# Altium PCB PetTrackerPCB.PcbDoc (part 1 of 2)
Units mm, origin at the board's own origin, x right, y up, seen from the top; angles counter-clockwise.
Board outline 116.71 x 58.42 mm, 4 copper layers (Top Layer, GND Plane, PWR Plane, Bottom Layer), stack 0.868 mm thick; 35 components, 37 nets, 209 pads, 70 vias.
Unrouted connection lines stored in the file: 47.
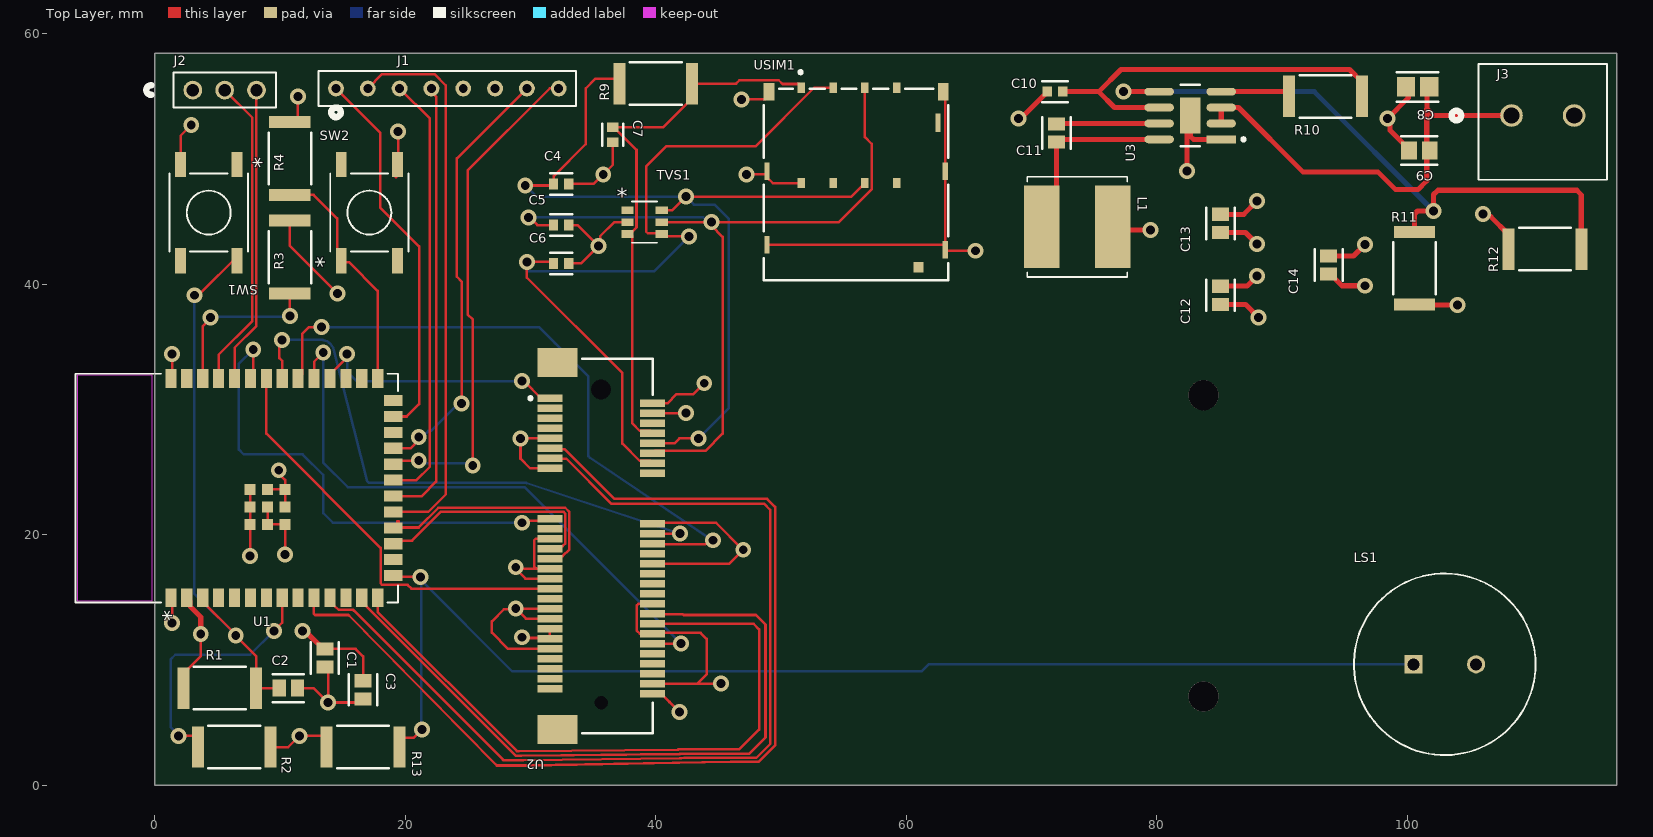
[diagram p0: Top Layer view]
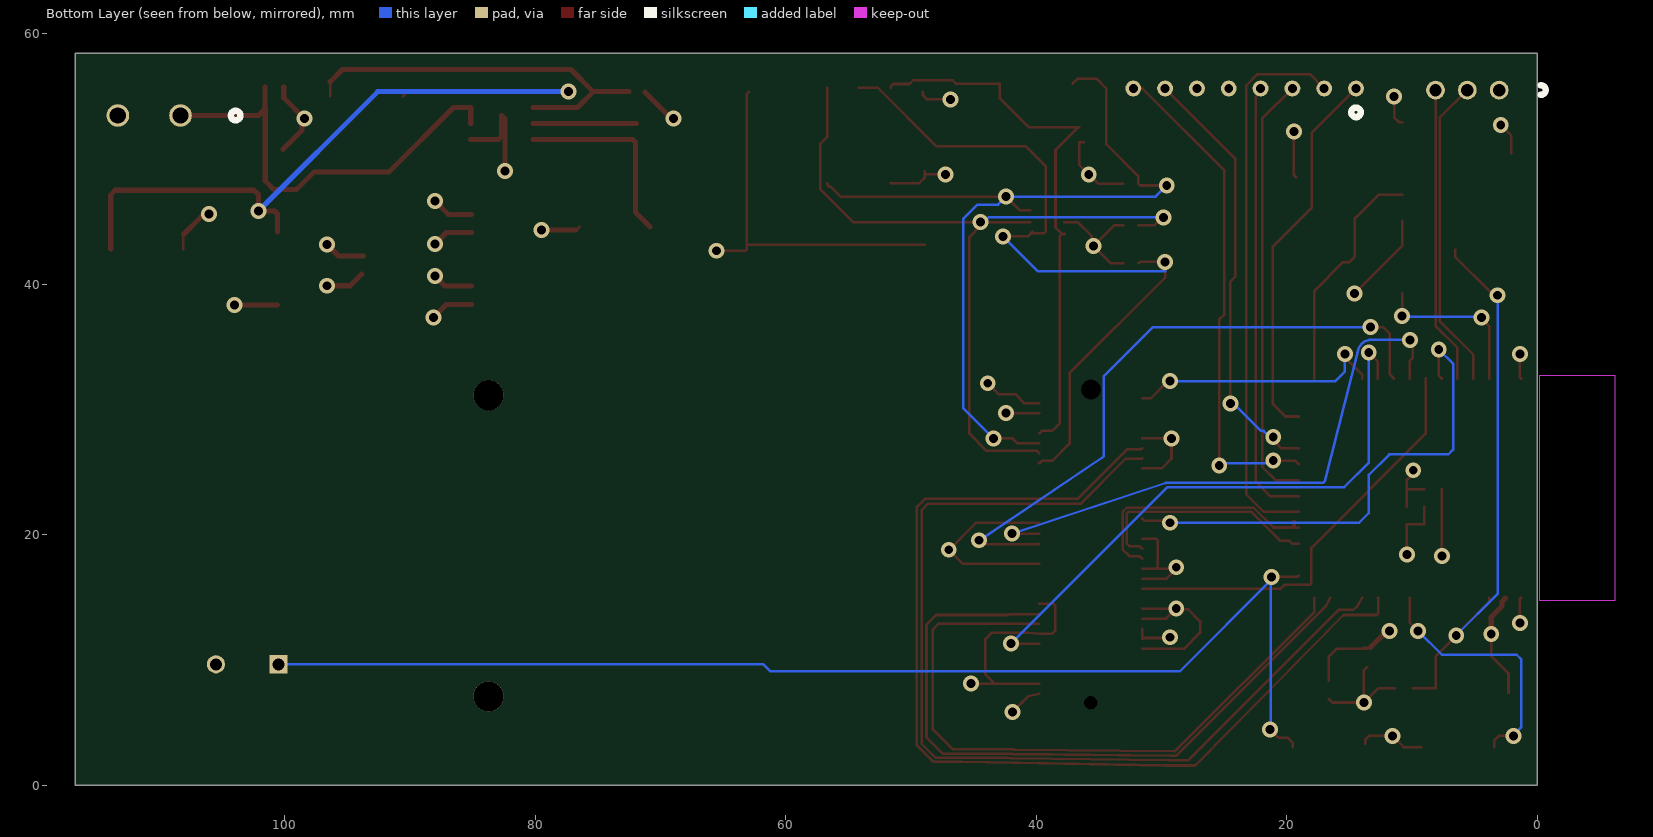
[diagram p1: Bottom Layer view, seen from below]
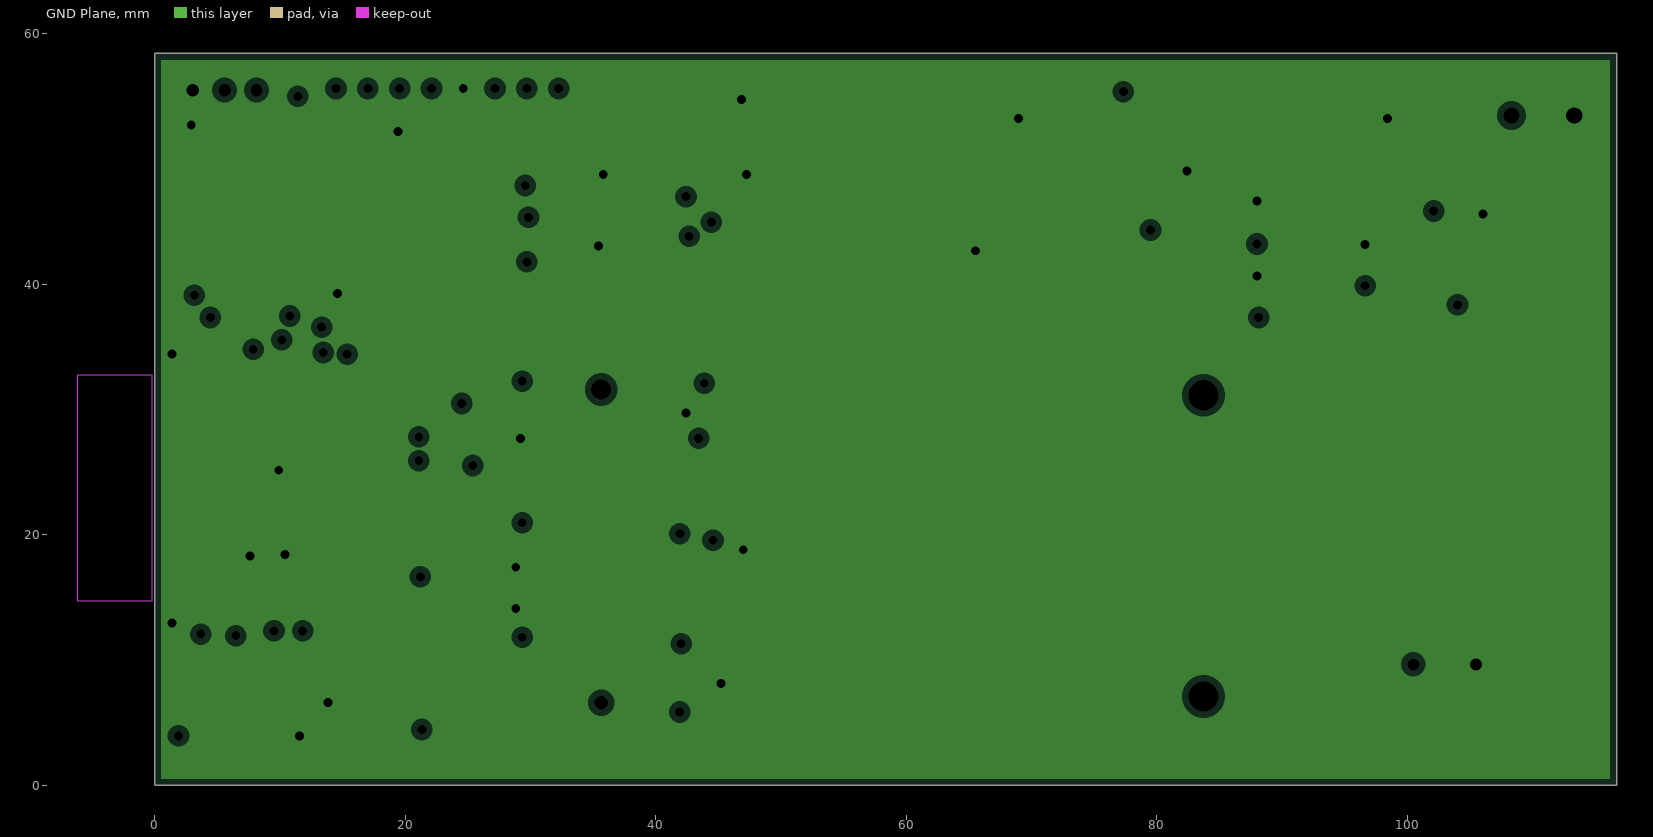
[diagram p2: GND Plane, clearances drawn from the general rule]
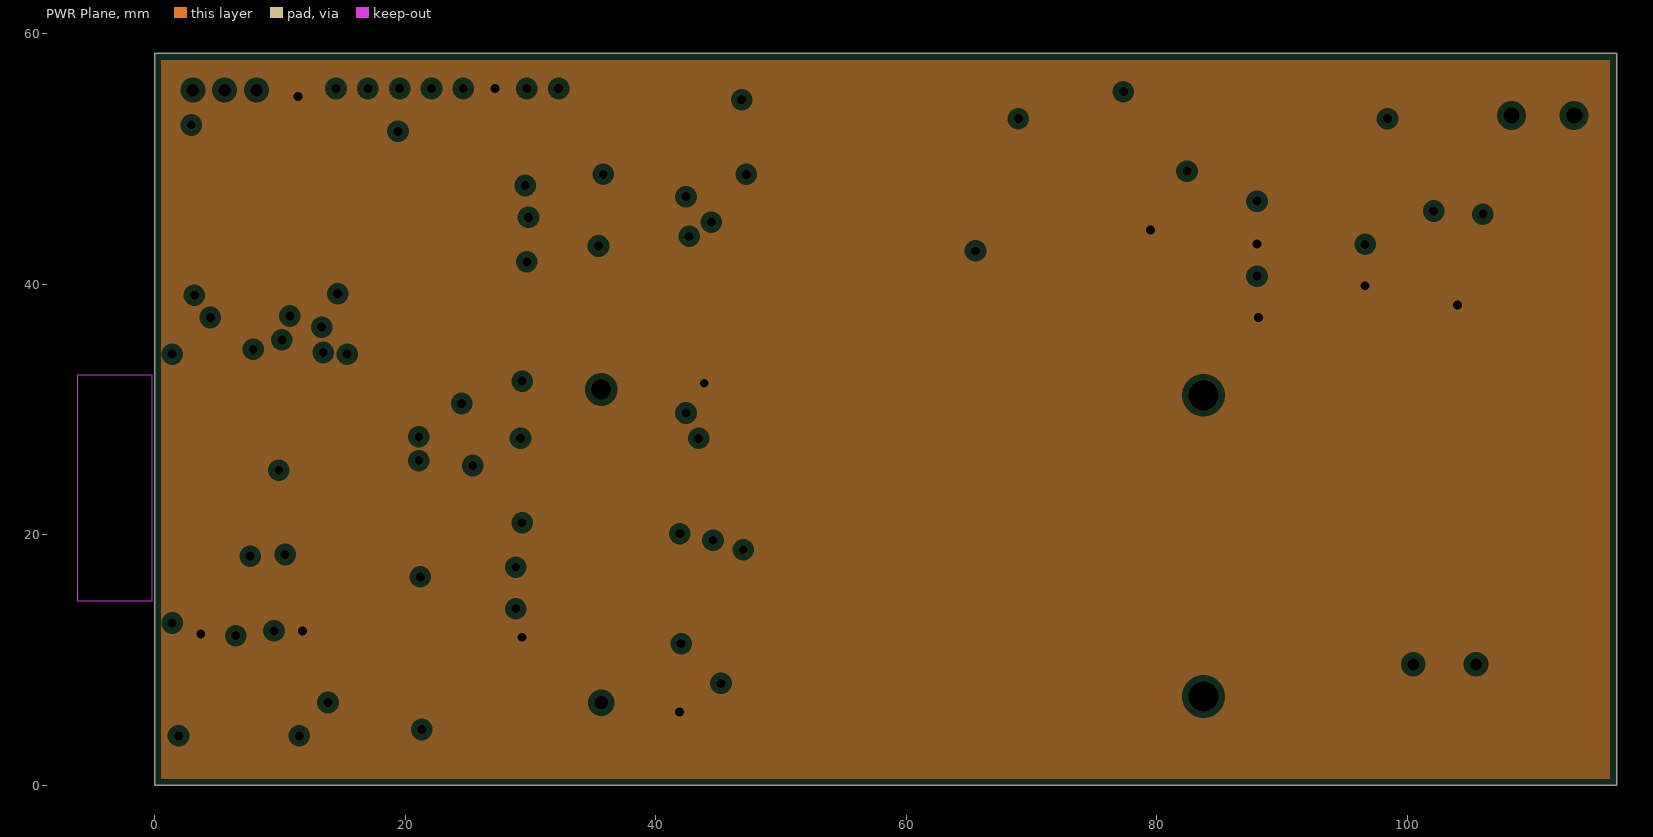
[diagram p3: PWR Plane, clearances drawn from the general rule]
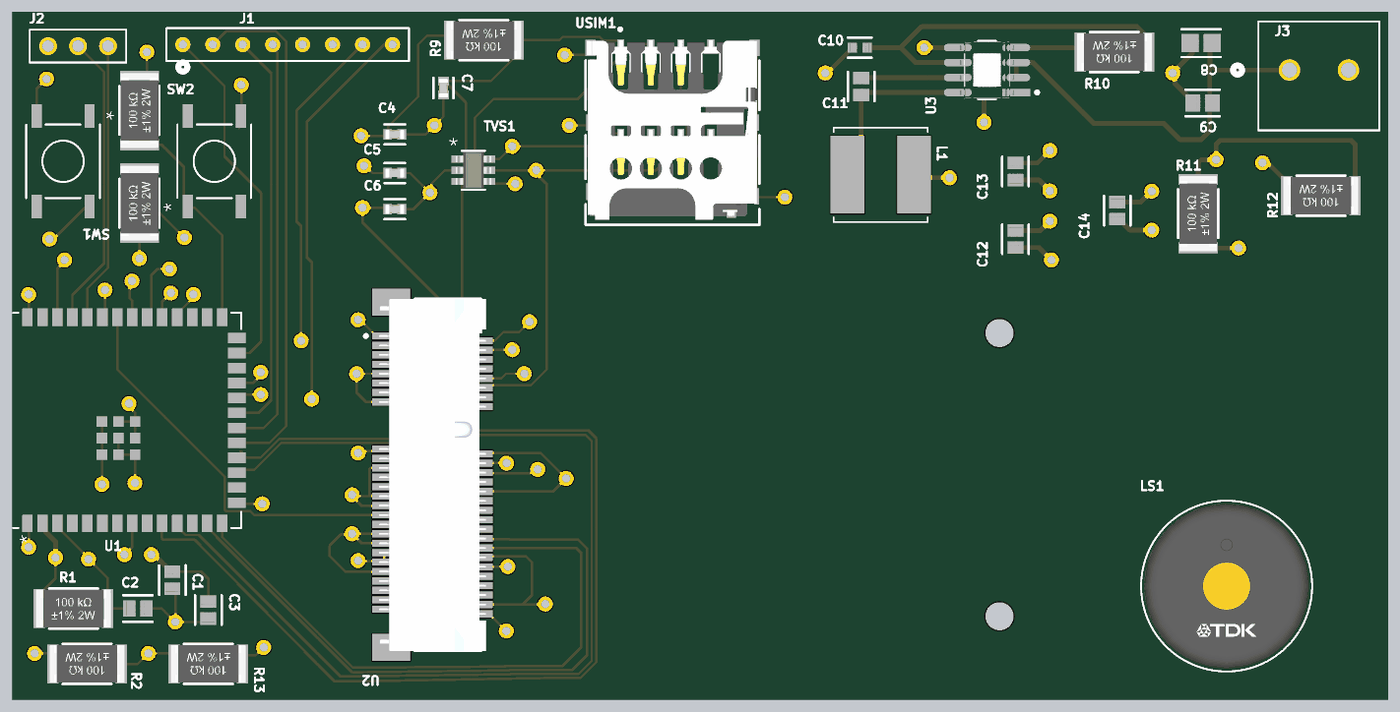
[diagram p4: 3D render of the assembled board from above, using the file's embedded part models]

## Layer stack, top to bottom
Top Solder: solder mask 0.0102, Solder Resist, Dk 3.5
Top Layer: signal copper 0.0356
Dielectric 4: core 0.1016, Core-009, Dk 4.5
Dielectric 2: core 0.1016, Core-009, Dk 4.5
GND Plane: plane copper 0.035, net GND
Dielectric 1: dielectric 0.32, FR-4, Dk 4.8
PWR Plane: plane copper 0.035, net +3V3
Dielectric 3: core 0.1016, Core-009, Dk 4.5
Dielectric 5: core 0.1016, Core-009, Dk 4.5
Bottom Layer: signal copper 0.0356
Bottom Solder: solder mask 0.0102, Solder Resist, Dk 3.5

## Board outline
0,0 116.713,0 116.713,58.42 0,58.42

## Design rules (kind name [scope] priority, off if disabled: settings)
Clearance [All] p1: gap=0.127 ignorepadtopadclearanceinfootprint=TRUE
Height [All] p1 off: minheight=0 maxheight=25.4 prefheight=12.7
PlaneClearance [All] p1: clearance=0.508
PlaneConnect [All] p1: planeconnectstyle=Relief reliefexpansion=0.508 reliefentries=4 reliefconductorwidth=0.254 reliefairgap=0.254
PolygonConnect [All] p1: connectstyle=Relief reliefconductorwidth=0.254 reliefentries=4 polygonreliefangle="90 Angle" airgapwidth=0.254
RoutingVias [All] p1: holewidth=0.711 width=1.27 viastyle="Through Hole" minholewidth=0.711 minwidth=1.27 maxholewidth=0.711 maxwidth=1.27
SolderMaskExpansion [All] p1: expansion=0.102 istentingtop=FALSE
SupplyNets "Schematic Supply Nets_2" [InNet('GND')] p1: voltage=0.000
SupplyNets "Schematic Supply Nets_1" [InNet('Vin')] p2: voltage=0.000
SupplyNets "Schematic Supply Nets" [InNet('+3V3')] p3: voltage=0.000
Width [All] p1: maxlimit=25.4 minlimit=0.127 preferedwidth=0.203
27 further rules are at their usual default settings.

## Classes and differential pairs
component class PowerSupply: C8 C9 C10 C11 C12 C13 C14 CBOOT CHF CIN Cout CVCC J3 L L1 R10 R11 R12 RFBB RFBT U3
component class EC25: C4 C5 C6 C7 CRF1 CRF2 CRF3 CRF4 R9 RDB1 RDB2 RDB3 RS1 TVS1 "TVS Array" U2 USIM1 "USIM Connector"
component class Dataflow: C1 C2 C3 "Camera Interface" J1 J2 LS1 R1 R2 R3 R4 R13 RDB RPU1 S2 SW1 SW2 U1 "USB Connector"

## Components (designator, comment, footprint, x,y, rotation, side; value= is the part's Value field where it differs from the comment)
C1 "22uF" FP-CL21-IPC_C 13.589,10.16 r270 top
C2 "100nF" FP-CL21-IPC_C 10.668,7.747 r0 top
C3 "100nF" FP-CL21-IPC_C 16.637,7.62 r270 top
C4 "0.1uF" FP-C0603C-CF-MFG 32.447,48.006 r0 top value="0.10 μF"
C5 "0.1uF" FP-C0603C-CF-MFG 32.447,44.72 r0 top value="0.10 μF"
C6 "0.1uF" FP-C0603C-CF-MFG 32.447,41.656 r0 top value="0.10 μF"
C7 "0.1uF" FP-C0603C-CF-MFG 36.576,51.943 r270 top value="0.10 μF"
C8 "10uF" FP-CL21-IPC_A 100.838,55.753 r180 top
C9 "220nF" FP-CL21-IPC_B 100.965,50.673 r180 top
C10 "1uF" FP-CL10-IPC_C 71.882,55.372 r180 top
C11 "100nF" FP-CL21-IPC_C 72.009,52.07 r270 top
C12 "22uF" FP-CL21-IPC_C 85.09,39.116 r90 top
C13 "22uF" FP-CL21-IPC_C 85.09,44.855 r90 top
C14 "22uF" FP-CL21-IPC_C 93.726,41.529 r90 top
J1 "TS-108-T-A" CON8_1X8_TU_HTS_SAI 23.368,55.626 r0 top
J2 "PREC003SAAN-RC" CONN_PREC003SAAN-RC_SUL 3.048,55.499 r0 top
J3 "1935161" CONN_1935161_PXC 108.331,53.467 r0 top value=10uF
L1 "6.8 µH" IND_SRN8040TA-6R8M 73.66,44.577 r0 top
LS1 "PS1440P02BT" FP-PS1440P02BT-MFG 102.997,9.652 r0 top
R1 "10kΩ" FP-CRGP2512-IPC_C 5.207,7.747 r0 top value=10KΩ
R2 "10kΩ" FP-CRGP2512-IPC_C 6.35,3.048 r180 top value=10KΩ
R3 "10kΩ" FP-CRGP2512-IPC_C 10.795,42.164 r90 top value=10KΩ
R4 "10kΩ" FP-CRGP2512-IPC_C 10.795,50.038 r90 top value=10KΩ
R9 "15kΩ" FP-CRGP2512-IPC_C 40.005,56.007 r180 top value=15KΩ
R10 "100kΩ" FP-CRGP2512-IPC_C 93.472,54.991 r180 top value=100KΩ
R11 "100kΩ" FP-CRGP2512-IPC_C 100.584,41.275 r90 top
R12 "3.3kΩ" FP-CRGP2512-IPC_C 110.998,42.799 r180 top value=3.3KΩ
R13 "1kΩ" FP-CRGP2512-IPC_C 16.637,3.048 r180 top value=1KΩ
SW1 "PTS645SL43SMTR92LFS" PTS645SL43SMTR92LFS_CNK 4.318,45.72 r270 top
SW2 "PTS645SL43SMTR92LFS" PTS645SL43SMTR92LFS_CNK 17.145,45.72 r90 top
TVS1 "AQRV05-4HTG" SOT23-6_LTF 39.116,44.958 r0 top
U1 "ESP32-S2-SOLO-N4R2" MOD41_ESP32-S2-SOLO_EXP 6.557,23.722 r90 top
U2 "2041119-1" TECO-2041119-1_3_V 35.651,19.092 r270 top
U3 "LMR33640ADDAR" FP-DDA0008J-IPC_A 82.677,53.467 r180 top
USIM1 "78727-0001" FP-78727-0001-MFG 56.007,46.609 r90 top

## Footprints (in the part's own frame and the unit in brackets; to place one, negate y for a bottom-side part, rotate by r counter-clockwise, add the part's x,y. Pads: shape width x height; smd on the part's side, far side on the other; paste and mask are expansions set on the pad)
CON8_1X8_TU_HTS_SAI [mil]
  round 50 / inner round 60 / far side round 50 hole 28 paste-99999 mask+0: 1(-350,0) 2(-250,0) 3(-150,0) 4(-50,0) 5(50,0) 6(150,0) 7(250,0) 8(350,0)
  silkscreen extent -405,-90 405,55
CONN_1935161_PXC [mil]
  round 71 / inner round 60 / far side round 71 hole 51 paste-99999 mask+0: 1(0,0) 2(196.85,0)
  silkscreen extent -188,-202 300,162
CONN_PREC003SAAN-RC_SUL [mil]
  round 59 / inner round 60 / far side round 59 hole 39 paste-99999 mask+0: 1(0,0) 2(100,0) 3(200,0)
  silkscreen extent -146,-55 261,55
FP-78727-0001-MFG [mm]
  rect 1.4x0.42 smd paste+0 mask+0: 1(-3.465,7.11) 2(2.395,7.11) 5(-3.865,-7.12) 6(2.395,-7.12)
  rect 1.4x0.87 smd paste+0 mask+0: 3(8.745,6.95) 8(8.745,-6.95)
  rect 0.85x0.8 smd paste+0 mask+0: 4(-5.245,-4.98)
  rect 1.5x0.4 smd paste+0 mask+0: 7(6.275,-6.54)
  rect 0.8x0.6 smd paste+0 mask+0: C1(9.075,4.38) C2(9.075,1.84) C3(9.075,-0.7) C4(9.075,-3.24) C5(1.455,4.38) C6(1.455,1.84) C7(1.455,-0.7) C8(1.455,-3.24)
  silkscreen extent -6.28,-7.36 10.44,7.36, body extent -6.38,-7.48 9.57,7.48, height 0.25
FP-C0603C-CF-MFG [mm]
  rect 0.75x0.9 smd paste+0 mask+0: 1(-0.6,0) 2(0.6,0)
  silkscreen extent -0.88,-0.85 0.88,0.85, body extent -1.2,-0.6 1.2,0.6, height 0.25
FP-CL10-IPC_C [mm]
  rect 0.758x0.812 smd paste+0 mask+0: 1(-0.627,0) 2(0.627,0)
  silkscreen extent -1.01,-0.85 1.01,0.85, body extent -1.11,-0.55 1.11,0.55, height 0.25
FP-CL21-IPC_A [mm]
  rect 1.455x1.556 smd paste+0 mask+0: 1(-0.926,0) 2(0.926,0)
  silkscreen extent -1.65,-1.18 1.65,1.18, body extent -2.15,-1.28 2.15,1.28, height 0.25
FP-CL21-IPC_B [mm]
  rect 1.255x1.456 smd paste+0 mask+0: 1(-0.826,0) 2(0.826,0)
  silkscreen extent -1.45,-1.13 1.45,1.13, body extent -1.7,-0.98 1.7,0.98, height 0.25
FP-CL21-IPC_C [mm]
  rect 1.055x1.356 smd paste+0 mask+0: 1(-0.726,0) 2(0.726,0)
  silkscreen extent -1.25,-1.12 1.25,1.12, body extent -1.35,-0.82 1.35,0.82, height 0.25
FP-CRGP2512-IPC_C [mm]
  rect 0.958x3.306 smd paste+0 mask+0: 1(-2.902,0) 2(2.902,0)
  silkscreen extent -2.07,-1.7 2.07,1.7, body extent -3.48,-1.8 3.48,1.8, height 0.25
FP-DDA0008J-IPC_A [mm]
  rect 2.353x0.622 smd paste+0 mask+0: 1(-2.477,1.905)
  rrect100% 2.353x0.622 smd paste+0 mask+0: 2(-2.477,0.635) 3(-2.477,-0.635) 4(-2.477,-1.905) 5(2.477,-1.905) 6(2.477,-0.635) 7(2.477,0.635) 8(2.477,1.905)
  rect 1.604x2.855 smd paste+0 mask+0: 9(0,0)
  silkscreen extent -4.38,-2.45 0.75,2.45, body extent -4.15,-2.95 4.15,2.95, height 0.25
FP-PS1440P02BT-MFG [mm]
  rect 1.45x1.45 hole 0.95 paste-2539.97 mask+0: 1(-2.5,0)
  round 1.45 hole 0.95 paste-2539.97 mask+0: 2(2.5,0)
  silkscreen extent -7.25,-7.25 7.25,7.25, body extent -7.35,-7.35 7.35,7.35, height 0.25
IND_SRN8040TA-6R8M [mm]
  rect 2.85x6.6 smd: 1(-2.825,0) 2(2.825,0)
  silkscreen extent -4,-4 4,4
MOD41_ESP32-S2-SOLO_EXP [mil]
  rect 59x35 smd paste+0 mask+0: 1(-344.49,207.09) 2(-344.49,157.09) 3(-344.49,107.09) 4(-344.49,57.09) 5(-344.49,7.09) 6(-344.49,-42.91) 7(-344.49,-92.91) 8(-344.49,-142.91) 9(-344.49,-192.91) 10(-344.49,-242.91) 11(-344.49,-292.91) 12(-344.49,-342.91) 13(-344.49,-392.91) 14(-344.49,-442.91) 27(344.49,-442.91) 28(344.49,-392.91) 29(344.49,-342.91) 30(344.49,-292.91) 31(344.49,-242.91) 32(344.49,-192.91) 33(344.49,-142.91) 34(344.49,-92.91) 35(344.49,-42.91) 36(344.49,7.09) 37(344.49,57.09) 38(344.49,107.09) 39(344.49,157.09) 40(344.49,207.09)
  rect 35x59 smd paste+0 mask+0: 15(-275,-492.13) 16(-225,-492.13) 17(-175,-492.13) 18(-125,-492.13) 19(-75,-492.13) 20(-25,-492.13) 21(25,-492.13) 22(75,-492.13) 23(125,-492.13) 24(175,-492.13) 25(225,-492.13) 26(275,-492.13)
  rect 35x35 smd paste+0 mask+0: 41(-59.05,-96.85) 42(-114.17,-41.73) 43(-114.17,-96.85) 44(-114.17,-151.97) 45(-59.05,-151.97) 46(-3.94,-151.97) 47(-3.94,-96.85) 48(-3.94,-41.73) 49(-59.05,-41.73)
  Keep-Out Layer region: 354.5,502 -354.5,502 -354.5,266 354.5,266
  silkscreen extent -359,-507 360,507
PTS645SL43SMTR92LFS_CNK [mil]
  rect 79x34 smd paste+0 mask+0: 1(-151.5,88.58) 2(151.5,88.58) 3(-151.5,-88.58) 4(151.5,-88.58)
  silkscreen extent -123,-123 123,123
SOT23-6_LTF [mil]
  rect 38.5x24 smd paste+0 mask+0: 1(-53.75,37.4) 2(-53.75,0) 3(-53.75,-37.4) 4(53.75,-37.4) 5(53.75,0) 6(53.75,37.4)
  silkscreen extent -40,-65 40,65, body extent -59,-60 59,60, height 57
TECO-2041119-1_3_V [mm] "Connector, 52-Leads, Body 29.9x8.2mm, Pitch 0.4mm"
  rect 0.6x2 smd: 1(-11.8,-4.1) 2(-11.4,4.1) 3(-11,-4.1) 4(-10.6,4.1) 5(-10.2,-4.1) 6(-9.8,4.1) 7(-9.4,-4.1) 8(-9,4.1) 9(-8.6,-4.1) 10(-8.2,4.1) 11(-7.8,-4.1) 12(-7.4,4.1) 13(-7,-4.1) 14(-6.6,4.1) 15(-6.2,-4.1) 16(-5.8,4.1) 17(-2.2,-4.1) 18(-1.8,4.1) 19(-1.4,-4.1) 20(-1,4.1) 21(-0.6,-4.1) 22(-0.2,4.1) 23(0.2,-4.1) 24(0.6,4.1) 25(1,-4.1) 26(1.4,4.1) 27(1.8,-4.1) 28(2.2,4.1) 29(2.6,-4.1) 30(3,4.1) 31(3.4,-4.1) 32(3.8,4.1) 33(4.2,-4.1) 34(4.6,4.1) 35(5,-4.1) 36(5.4,4.1) 37(5.8,-4.1) 38(6.2,4.1) 39(6.6,-4.1) 40(7,4.1) 41(7.4,-4.1) 42(7.8,4.1) 43(8.2,-4.1) 44(8.6,4.1) 45(9,-4.1) 46(9.4,4.1) 47(9.8,-4.1) 48(10.2,4.1) 49(10.6,-4.1) 50(11,4.1) 51(11.4,-4.1) 52(11.8,4.1)
  round 1.3 hole 1.6 unplated: MH1(-12.5,0)
  round 0.9 hole 1.1 unplated: MH2(12.5,0)
  rect 2.3x3.2 smd: MP1(-14.65,-3.5) MP2(14.65,-3.5)
  silkscreen extent -14.95,-5.77 14.95,4.1, body extent -14.95,-4.54 14.95,4.55, height 4

## Part data
C1 C12 C13 C14: library part CMP-13271-003225-1, "CL21A226MAYNNNE CL21 Series 0805 22uF 25V ±20% Tolerance X5R Multilayer Ceramic Chip Capacitor"
C2 C3 C11: library part CMP-13271-002854-1, "CL21B104KACNNNC CL21 Series 0805 100nF 25V ±10% Tolerance X7R Multilayer Ceramic Chip Capacitor", Case Code (Imperial)=0805, Case Code (Metric)=2012, Dielectric=X7R, Max Operating Temperature=125°C, Min Operating Temperature=-55°C, Package Quantity=1, Tolerance=10%, Voltage=25V, Capacitance=100nF, Case/Package=0805, Contact Plating=Tin, Depth=1.25mm, Height=0.85mm, Length=2mm, Mount="Surface Mount", Packaging="Tape and Reel", Radiation Hardening=No, Thickness=0.037inch, Voltage Rating=25V, Width=0.049inch
C4 C5 C6 C7: library part CMP-2006-03056-2, "C0603C104J5RACTU CAP CER 0.1UF 50V 5% X7R 0603", Capacitance="0.10 μF", Manufacturer=KEMET, Manufacturer Part Number=C0603C104J5RACTU, Package=C0603C-CF, Temperature="-55°C to +125°C", Temperature Characteristic=X7R, Temperature Coefficient=30ppm/°C, Temperature Range High=+125°C, Temperature Range Low=-55°C, Tolerance=0.05, Voltage Rating="50 V", Automotive=Yes, Automotive Grade="Grade 1", Category=Cap, ComponentLink2Description=Datasheet, ComponentLink2URL=https://api.kemet.com/component-edge/download/datasheet/C0603C100J5GACAUTO.pdf, Device Class L1="Passive Components", Device Class L2=Capacitors, Device Class L3="Ceramic Capacitors", Digikey Description="CAP CER 0.1UF 50V 5% X7R 0603", Height=0.87mm, Lead Free=Yes, Material=Ceramic, Mouser Description="Multilayer Ceramic Capacitors MLCC - SMD/SMT 50volts 0.1uF X7R 5%", Octopart=https://octopart.com/c0603c104j5ractu-kemet-10440638, RoHS=TRUE
C8: library part CMP-13271-002975-1, "CL21A106KAYNNNE CL21 Series 0805 10uF 25V ±10% Tolerance X5R Multilayer Ceramic Chip Capacitor", Case Code (Imperial)=0805, Case Code (Metric)=2012, Dielectric=X5R, Max Operating Temperature=85°C, Min Operating Temperature=-55°C, Package Quantity=1, Tolerance=10%, Voltage Rating=25V, Capacitance=10uF, Case/Package=0805, Depth=1.25mm, Height=1.25mm, Length=2mm, Mount="Surface Mount", Packaging="Tape and Reel", Radiation Hardening=No, Thickness=0.057inch, Width=0.049inch
C9: library part CMP-13271-002523-1, "CL21B224KAFNNNE CL21 Series 0805 220nF 25V ±10% Tolerance X7R Multilayer Ceramic Chip Capacitor", Case Code (Imperial)=0805, Case Code (Metric)=2012, Dielectric=X7R, Max Operating Temperature=125°C, Min Operating Temperature=-55°C, Package Quantity=1, Tolerance=10%, Voltage Rating=25V, Capacitance=220nF, Case/Package=0805, Contact Plating=Tin, Depth=1.25mm, Height=1.25mm, Length=2mm, Mount="Surface Mount", Packaging="Tape and Reel", Radiation Hardening=No, Thickness=0.053inch, Width=0.049inch
C10: library part CMP-13271-004127-1, "CL10A105KA8NNNC Cap Ceramic 1uF 25V X5R ±10% Pad SMD 0603 +85°C T/R", Case Code (Imperial)=0603, Case Code (Metric)=1608, Dielectric=X5R, Max Operating Temperature=85°C, Min Operating Temperature=-55°C, Package Quantity=1, Tolerance=10%, Voltage=25V, Capacitance=1uF, Case/Package=0603, Contact Plating=Tin, Depth=0.8mm, Height=0.8mm, Lead Free="Lead Free", Length=1.6mm, Material=Ceramic, Mount="Surface Mount", Packaging="Tape and Reel", Radiation Hardening=No, Thickness=0.035inch, Voltage Rating=25V, Voltage Rating (DC)=25V, Width=0.031inch
J1: "No Description Available", Mfr_Name="Samtec Inc", RefDes=RefDes, Type=Type
J2: "No Description Available", Mfr_Name=Sullins, Digi-Key_Part_Number_1=S1012EC-03-ND, RefDes=RefDes, Type=Type
J3: "Ceramic Capacitor, Multilayer, Ceramic, 16V, 10% +Tol, 10% -Tol, X5R, 15% TC, 10uF, Surface Mount, 0805", Capacitor Type=Ceramic, Case/Package=0805, Manufacturer=Samsung, Manufacturer Part Number=CL21A106KOQNNNE, Max Operating Temperature=85°C, Mfr_Name="Phoenix Contact", Min Operating Temperature=-55°C, Package Shape=Rectangular, Package Style=SMTMeter, Rated DC Voltage (URdc)=16V, Supplier Part Number=1276-1096-1-ND, Temperature Characteristics Code=X5R, Tolerance  (fill in as +-)=10%, Category="Ceramic Capacitors", ComponentLink1Description=https://datasheet.ciiva.com:443/pdfs/VipMasterIC/IC/SEMS/SEMS-S-A0008520559/SEMS-S-A0008520510-1.pdf?src-supplier=IHS+Markit, ComponentLink1URL=https://datasheet.ciiva.com:443/pdfs/VipMasterIC/IC/SEMS/SEMS-S-A0008520559/SEMS-S-A0008520510-1.pdf?src-supplier=IHS+Markit, ComponentLink2Description=https://datasheet.ciiva.com/15216/getdatasheetpartid-358435-15216234.pdf?src-supplier=Verical, ComponentLink2URL=https://datasheet.ciiva.com/15216/getdatasheetpartid-358435-15216234.pdf?src-supplier=Verical, ComponentLink3Description=https://datasheet.ciiva.com/25798/cl21a106koqnnne-25798133.pdf?src-supplier=Digikey, ComponentLink3URL=https://datasheet.ciiva.com/25798/cl21a106koqnnne-25798133.pdf?src-supplier=Digikey, Dielectric Material=Ceramic, Height=1.4mm, JESD-609 Code=e3, Length=2mm, Mounting Technology="Surface Mount", Multilayer=Yes, Packaging="Tape and Reel", Pins=2, Pricing="1=0.1, 10=0.07, 50=0.0404, 100=0.0313, 500=0.02354, 1000=0.0185 (USD)", Reach SVHC Compliant=Yes, RefDes=RefDes, RoHS=Yes, RoHS Compliant=Yes, Stock=3573508, Supplier=Digikey, Terminal Finish=Nickel, Termination=Wraparound, Tolerance (fill in as +-)=10%, Type=Type, Width=1.25mm
L1: library part SRN8040TA-6R8M, "SRN8040TA-6R8M FIXED IND 6.8UH 5.1A 25 MOHM SMD", Package=None, Availability=Unavailable, MP=SRN8040TA-6R8M, Price=None
LS1: library part CMP-08413-000003-1, "AUDIO PIEZO TRANSDUCER 30V TH", Frequency=4kHz, Max Operating Temperature=70°C, Min Operating Temperature=-10°C, Operating Supply Voltage=3V, Package Quantity=350, Diameter=14mm, Height=8mm, Lead Free="Lead Free", Mount="Through Hole", Number of Terminals/Pins=2, Packaging="Tape and Reel", RoHS Compliant=Yes, Self Resonant Frequency=4kHz, Termination="PC Pins", Voltage Rating (DC)=3V, Washable=No
R1 R2 R3 R4: library part CMP-03211-007941-1, "CRGP2512F10K CRGP 2512 10K 1%", Ambient Temperature Range High=+70°C, Manufacturer=TE, Manufacturer Part Number=CRGP2512F10K, Package=CRGP2512, Power Rating=2W, Resistance=10KΩ, Temperature="-55°C to +155°C", Temperature Coefficient=±100ppm/°C, Temperature Range High=+155°C, Temperature Range Low=-55°C, Tolerance=0.01, Voltage Rating=500V, Automotive=No, Category=Res, ComponentLink2Description=Datasheet, ComponentLink2URL=https://www.mouser.ca/datasheet/2/418/NG_DS_9-1773463-9_A-1358566.pdf, Composition="Thick Film", Device Class L1="Passive Components", Device Class L2=Resistors, Device Class L3="Chip SMD Resistors", Digikey Description="CRGP 2512 10K 1%", Height=0.65mm, Ipc Land Pattern Name=RESC635320X55, Lead Free=Yes, Octopart=https://octopart.com/crgp2512f10k-te+connectivity-91019026, RoHS=TRUE, Series=CRGP
R9: library part CMP-03211-008564-1, "CRGP2512F15K CRGP2512 15KΩ 2W ±100ppm/°C 1% 500V", Ambient Temperature Range High=+70°C, Manufacturer=TE, Manufacturer Part Number=CRGP2512F15K, Package=CRGP2512, Power Rating=2W, Resistance=15KΩ, Temperature="-55°C to +155°C", Temperature Coefficient=±100ppm/°C, Temperature Range High=+155°C, Temperature Range Low=-55°C, Tolerance=0.01, Voltage Rating=500V, Automotive=No, Category=Res, ComponentLink2Description=Datasheet, ComponentLink2URL=https://www.mouser.ca/datasheet/2/418/NG_DS_9-1773463-9_A-1358566.pdf, Composition="Thick Film", Device Class L1="Passive Components", Device Class L2=Resistors, Device Class L3="Chip SMD Resistors", Height=0.65mm, Ipc Land Pattern Name=RESC635320X55, Lead Free=Yes, Octopart=https://octopart.com/crgp2512f15k-te+connectivity-91019034, RoHS=TRUE, Series=CRGP
R10: library part CMP-03211-001791-1, "CRGP2512F100K CRGP2512 100KΩ 2W ±100ppm/°C 1% 500V", Ambient Temperature Range High=+70°C, Manufacturer=TE, Manufacturer Part Number=CRGP2512F100K, Package=CRGP2512, Power Rating=2W, Resistance=100KΩ, Temperature="-55°C to +155°C", Temperature Coefficient=±100ppm/°C, Temperature Range High=+155°C, Temperature Range Low=-55°C, Tolerance=0.01, Voltage Rating=500V, Automotive=No, Category=Res, ComponentLink2Description=Datasheet, ComponentLink2URL=https://www.mouser.ca/datasheet/2/418/NG_DS_9-1773463-9_A-1358566.pdf, Composition="Thick Film", Device Class L1="Passive Components", Device Class L2=Resistors, Device Class L3="Chip SMD Resistors", Height=0.65mm, Ipc Land Pattern Name=RESC635320X55, Lead Free=Yes, Octopart=https://octopart.com/crgp2512f100k-te+connectivity-91019024, RoHS=TRUE, Series=CRGP
R11: library part 3560100KJT, "No Description Available", Mfr_Name="TE Connectivity"
R12: library part CMP-03211-004979-1, "CRGP2512F3K3 CRGP2512 3.3KΩ 2W ±100ppm/°C 1% 500V", Ambient Temperature Range High=+70°C, Manufacturer=TE, Manufacturer Part Number=CRGP2512F3K3, Package=CRGP2512, Power Rating=2W, Resistance=3.3KΩ, Temperature="-55°C to +155°C", Temperature Coefficient=±100ppm/°C, Temperature Range High=+155°C, Temperature Range Low=-55°C, Tolerance=0.01, Voltage Rating=500V, Automotive=No, Category=Res, ComponentLink2Description=Datasheet, ComponentLink2URL=https://www.mouser.ca/datasheet/2/418/NG_DS_9-1773463-9_A-1358566.pdf, Composition="Thick Film", Device Class L1="Passive Components", Device Class L2=Resistors, Device Class L3="Chip SMD Resistors", Height=0.65mm, Ipc Land Pattern Name=RESC635320X55, Lead Free=Yes, Octopart=https://octopart.com/crgp2512f3k3-te+connectivity-91019064, RoHS=TRUE, Series=CRGP
R13: library part CMP-03211-007859-1, "CRGP2512F1K0 Res, 1K, 1%, 2W, 2512, Thick Film", Ambient Temperature Range High=+70°C, Manufacturer=TE, Manufacturer Part Number=CRGP2512F1K0, Package=CRGP2512, Power Rating=2W, Resistance=1KΩ, Temperature="-55°C to +155°C", Temperature Coefficient=±100ppm/°C, Temperature Range High=+155°C, Temperature Range Low=-55°C, Tolerance=0.01, Voltage Rating=500V, Automotive=No, Category=Res, ComponentLink2Description=Datasheet, ComponentLink2URL=https://www.mouser.ca/datasheet/2/418/NG_DS_9-1773463-9_A-1358566.pdf, Composition="Thick Film", Device Class L1="Passive Components", Device Class L2=Resistors, Device Class L3="Chip SMD Resistors", Digikey Description="Res, 1K, 1%, 2W, 2512, Thick Film", Height=0.65mm, Ipc Land Pattern Name=RESC635320X55, Lead Free=Yes, Octopart=https://octopart.com/crgp2512f1k0-te+connectivity-91019040, RoHS=TRUE, Series=CRGP
SW1 SW2: "No Description Available", Mfr_Name="C&K Components", RefDes=RefDes, Type=Type
TVS1: "No Description Available", Mfr_Name="Littelfuse Inc", RefDes=RefDes, Type=Type
U1: "No Description Available", Mfr_Name="Espressif Systems", RefDes=RefDes, Type=RF
U2: library part CMP-2011-00000-2, "mSATA & PCI Express Mini Card Connector, Pitch 0.4 mm, 52 Position, Height 4 mm, RoHS, Tape and Reel", Case\Package=SMD, Housing Colour=Black, Manufacturer="TE Connectivity", Package Description="mSATA & PCI Express Mini Card Connector, Pitch 0.4 mm, 52 Position, Height 4 mm", Package Reference=2041119-1_3, Contact Material=Copper, Contact Plating=Gold, Contacts=52, Datasheet URL=http://www.te.com/commerce/DocumentDelivery/DDEController?Action=showdoc&DocId=Customer+Drawing%7F2041119%7FD%7Fpdf%7FEnglish%7FENG_CD_2041119_D.pdf%7F2041119-1, Datasheet Version=06/2016, ELV=Compliant, Height=4mm, Housing Material=Polymer, Length=29.9mm, Manufacturer URL=http://www.te.com/, Mount=SurfaceMount, Mounting Technology=SurfaceMount, Orientation=RightAngle, Packaging=TapeandReel, Poles=52, Radiation Hardening=No, RoHSCompliant=true, Rows=2, Termination=Solder, Width=9.02mm
U3: library part CMP-04918-000399-1, "36V 4A 400KHZ REGULATOR"
USIM1: library part CMP-04763-000002-1, "CONN MICRO SIM CARD PUSH-PULL", Current Rating=0.5A, Manufacturer=Molex, Temperature="-40°C to +85°C", Temperature Range High=+85°C, Temperature Range Low=-40°C, Voltage Rating=10V, Automotive=No, Category=Conn, ComponentLink2Description=Datasheet, ComponentLink2URL=https://www.molex.com/webdocs/datasheets/pdf/en-us/0787270001_MEMORY_CARD_SOCKET.pdf, Conn Orientation=Horizontal, Contact Material=Gold,Nickel, Device Class L1=Connectors, Device Class L2="Memory Connectors", Device Class L3=unset, Digikey Description="CONN MICRO SIM CARD PUSH-PULL", Footprint Url=https://www.molex.com/pdm_docs/sd/787270001_sd.pdf, Height=1.52mm, Is Female=yes, Lead Free=Yes, Manufacturer Part Number=78727-0001, Mouser Description="Micro-SIM Card holder Temperature range: -40 ... +85 °C Contact material: Copper Poles: 6", Number Of Contacts=6, Octopart=https://octopart.com/78727-0001-molex-24436211, Package=78727-0001, Pitch=2.54mm, RoHS=TRUE, Shielding=true

## Free pads (board coordinates)
  round 2.4 hole 2.4 unplated: 2(83.737,31.136) 3(83.737,7.091)

## Via types
v1: diameter 1.27, hole 0.711, Top Layer to Bottom Layer, 69 vias
v2: diameter 1.27/1.27 (per signal layer), hole 0.711, Top Layer to Bottom Layer, 1 vias

## Nets (pads, with @x,y where several pads share a name; then routed paths per layer and width w, separated by ;. In a path a pad name is that pad's centre, name@x,y a point inside that pad or via, vN(x,y) a via of type N, cw(c..) or ccw(c..) an arc to the next point about the centre after c; other vN are vias at no path point)
+3V3: C1.1 C3.1 C12.1 C13.1 C14.1 J1.6 L1.2 R1.1 R4.2 R11.1 U1.2 U2.2 U2.39 U2.41 U2.52 | length 46.2
  Top Layer w0.203: R1.1@2.305,7.366 2.305,8.921 3.683,10.299 v1(3.683,12.065) ; U1.2@2.54,14.945 U1.2 ; R4.2 11.053,52.94 11.43,53.317 v1(11.43,54.991) ; v1(11.811,12.319) v1@12.005,12.319 ; C1.1@13.335,10.989 C1.1@13.843,10.989 ; C1.1 16.038,10.886 16.637,10.287 C3.1 ; v1(29.337,11.811) 29.396,11.752 31.492,11.752 U2.41@31.547,11.696 ; U2.39 31.547,12.492 U2.41@31.547,11.696 ; U2.52 40.649,7.094 41.101,6.642 41.11,6.642 v1(41.91,5.842) ; U2.2 40.931,30.492 41.669,31.231 43.016,31.231 v1(43.879,32.094) ; L1.2 L1.2@76.739,44.323 ; C14.1 C14.1@93.877,40.803 ; R11.1 R11.1@100.603,38.354 ; U2.41@31.547,11.696 31.547,11.692 U2.41 U2.41@31.547,11.696
  Top Layer w0.406: U1.2@2.54,14.945 2.808,14.677 2.808,14.311 3.683,13.437 v1(3.683,12.065) ; v1@12.005,12.319 C1.1@13.335,10.989 ; L1.2@76.739,44.323 v2(79.502,44.323) ; C12.1 87.086,38.39 v1(88.138,37.338) ; C13.1 87.086,44.129 v1(88.011,43.204) ; C14.1@93.877,40.803 94.802,39.878 v1(96.647,39.878) ; R11.1@100.603,38.354 v1(104.013,38.354)
GND: C1.2 C2.2 C3.2 C4.2 C5.2 C6.2 C7.2 C8.2 C9.2 C10.2 C12.2 C13.2 C14.2 J1.5 J2.1 J3.2 LS1.2 R2.1 R3.2 R12.2 R13.2 SW1.3 SW2.4 TVS1.2 U1.1 U1.40 U1.41 U1.42 U1.43 U1.44 U1.45 U1.46 U1.47 U1.48 U1.49 U2.4 U2.9 U2.15 U2.18 U2.21 U2.26 U2.27 U2.29 U2.34 U2.35 U2.37 U2.40 U2.43 U2.50 U3.1 U3.9 USIM1.1 USIM1.2 USIM1.3 USIM1.5 USIM1.6 USIM1.8 USIM1.C5 | length 199.5
  Top Layer w0.203: U1.1 1.397,14.872 v1(1.397,12.954) ; U1.40 1.397,32.572 v1(1.397,34.417) ; SW1.3@2.068,50.457 2.068,51.852 v1(2.921,52.705) ; U1.48 U1.49 U1.42 7.62,20.819 v1(7.62,18.288) ; U1.41 U1.43 U1.44 10.414,20.819 v1(10.414,18.415) ; U1.47 U1.46 ; R2.1 10.668,3.048 v1(11.557,3.937) 13.448,3.937 13.735,3.65 R13.2@13.735,3.302 ; v1(9.906,25.146) 9.906,24.882 10.417,24.371 U1.46 ; U1.45 10.439,22.244 10.439,23.6 U1.46 ; R3.2 10.795,43.053 v1(14.605,39.243) ; C2.2 12.7,7.747 v1(13.843,6.604) ; C1.2 13.843,9.18 v1(13.843,6.604) ; C3.2@16.637,6.87 16.371,6.604 v1(13.843,6.604) ; 19.268,48.552 19.431,48.715 v1(19.431,52.197) ; v1(28.829,17.399) 28.829,17.272 29.609,16.492 U2.29 ; v1@28.936,17.292 30.48,17.292 ; U2.43 28.224,10.892 26.924,12.192 26.924,13.081 27.889,14.046 28.778,14.046 v1(28.829,14.097) v1@28.831,14.095 ; U2.37 29.634,13.292 v1@28.831,14.095 ; U2.35 31.549,14.095 v1@28.831,14.095 ; U2.27 30.48,17.292 ; U2.21 30.436,19.692 30.302,19.558 30.302,17.47 30.48,17.292 ; U2.15 29.988,25.292 29.21,26.07 v1(29.21,27.686) 29.213,27.689 31.548,27.689 U2.9 ; C6.2 34.036,41.656 v1(35.433,43.053) ; C5.2 33.766,44.72 v1(35.433,43.053) ; C4.2 35.052,48.006 v1(35.814,48.768) 36.576,49.53 C7.2 C7.2@36.217,51.343 ; TVS1.2 36.703,44.958 35.577,43.832 35.577,43.197 v1(35.433,43.053) ; U2.50 43.307,8.092 ; U2.34 38.647,14.492 38.506,14.351 38.506,12.319 38.733,12.092 U2.40 40.649,12.167 43.586,12.167 44.069,11.684 44.069,8.854 43.307,8.092 ; U2.26 45.886,17.692 v1(46.99,18.796) 44.832,20.954 39.813,20.954 U2.18 ; U2.4 39.764,29.705 42.405,29.705 v1(42.418,29.718) ; v1(45.212,8.128) 45.176,8.092 43.307,8.092 ; v1(46.863,54.737) 46.882,54.756 48.724,54.756 49.057,55.089 USIM1.3 ; v1(47.244,48.768) 48.789,48.768 USIM1.2@48.897,48.876 ; USIM1.1 63.019,43.144 USIM1.5@63.127,43.036 ; USIM1.2 USIM1.2@48.897,48.876 ; USIM1.C5 49.347,48.064 48.897,48.514 USIM1.2@48.897,48.876 ; USIM1.8 63.127,55.184 USIM1.6 USIM1.5@63.127,43.036 ; v1(65.532,42.672) 63.199,42.672 USIM1.5 USIM1.5@63.127,43.036 ; v1(68.961,53.213) v1@69.123,53.213 ; C10.2@71.255,55.345 C10.2 ; U3.9@82.423,53.213 U3.9 ; v1(98.425,53.213) v1@98.629,53.009 ; C9.2 C9.2@100.139,50.774 ; v1(106.045,45.593) 106.249,45.389 106.68,45.389 ; R12.2 R12.2@108.096,43.973
  Top Layer w0.406: v1@69.123,53.213 C10.2@71.255,55.345 ; v1(82.423,49.022) U3.9@82.423,53.213 ; U3.9 82.677,51.816 82.931,51.562 U3.1 ; C12.2 87.213,39.842 v1(88.011,40.64) ; C13.2 86.959,45.581 v1(88.011,46.633) ; C14.2 95.722,42.255 v1(96.647,43.18) ; v1(98.425,53.213) 100.088,54.876 C8.2@100.088,55.753 ; v1@98.629,53.009 98.629,52.284 C9.2@100.139,50.774 ; 106.68,45.389 R12.2@108.096,43.973
GSM_DTR: U1.34 U2.31 | length 33.8
  Top Layer w0.203: U1.34 8.917,28.067 18.034,18.95 18.034,16.129 18.161,16.002 20.193,16.002 20.503,15.692 U2.31
GSM_LED_WWAN#: U1.31 U2.42 | length 48
  Top Layer w0.203: U1.31 12.727,33.809 v1(13.462,34.544) ; U2.42 40.649,11.303 v1(42.037,11.303)
  Bottom Layer w0.203: v1(13.462,34.544) 13.462,25.781 13.45,25.769 15.415,23.804 29.536,23.804 v1(42.037,11.303)
GSM_PERST#: U1.32 U2.22 | length 51.8
  Top Layer w0.203: U1.32 11.8,32.815 11.8,36.057 12.319,36.576 v1(13.335,36.576) ; U2.22 39.816,19.227 43.957,19.227 44.288,19.558 v1(44.577,19.558)
  Bottom Layer w0.203: v1(13.335,36.576) 30.683,36.576 31.953,35.306 34.62,32.639 34.62,26.272 34.739,26.153 44.525,19.558 v1(44.577,19.558)
GSM_RI: U1.35 U2.17 | length 40.1
  Top Layer w0.203: U1.35 7.874,32.699 v1(7.874,34.798) ; v1(29.337,20.955) 29.506,21.124 31.383,21.124 U2.17
  Bottom Layer w0.203: v1(7.874,34.798) 6.731,33.655 6.731,26.797 7.112,26.416 11.811,26.416 13.462,24.765 13.462,21.717 14.224,20.955 v1(29.337,20.955)
GSM_W_DISABLE#: U1.33 U2.20 | length 459.9
  Top Layer w0.203: v1(10.16,35.56) 9.956,35.356 9.956,34.108 10.187,33.877 U1.33 ; U2.20 v1@41.934,20.091
  Bottom Layer w0.203: v1(41.934,20.09) 29.686,24.127 29.655,24.137 27.819,24.137 27.817,24.135 17.098,24.135 16.979,24.254 14.299,34.757 ; v1(10.16,35.56) 13.266,35.56 ; v1(10.16,35.56) 13.266,35.56 ; v1(10.16,35.56) 13.266,35.56 ; v1(10.16,35.56) 13.266,35.56 ; 13.266,35.56 cw(c13.266,34.494) 14.299,34.757 ; 13.266,35.56 cw(c13.266,34.494) 14.299,34.757 ; 13.266,35.56 cw(c13.266,34.494) 14.299,34.757 ; 13.266,35.56 cw(c13.266,34.494) 14.299,34.757 ; 13.266,35.56 cw(c13.266,34.494) 14.299,34.757 ; 13.266,35.56 cw(c13.266,34.494) 14.299,34.757 ; 13.266,35.56 cw(c13.266,34.494) 14.299,34.757 ; 13.266,35.56 cw(c13.266,34.494) 14.299,34.757 ; 13.266,35.56 cw(c13.266,34.494) 14.299,34.757 ; 13.266,35.56 cw(c13.266,34.494) 14.299,34.757 ; 13.266,35.56 cw(c13.266,34.494) 14.299,34.757 ; 13.266,35.56 cw(c13.266,34.494) 14.299,34.757 ; 13.266,35.56 cw(c13.266,34.494) 14.299,34.757 ; 13.266,35.56 cw(c13.266,34.494) 14.299,34.757 ; 13.266,35.56 cw(c13.266,34.494) 14.299,34.757 ; 13.266,35.56 cw(c13.266,34.494) 14.299,34.757 ; 13.266,35.56 cw(c13.266,34.494) 14.299,34.757 ; 13.266,35.56 cw(c13.266,34.494) 14.299,34.757 ; 13.266,35.56 cw(c13.266,34.494) 14.299,34.757 ; 13.266,35.56 cw(c13.266,34.494) 14.299,34.757 ; 13.266,35.56 cw(c13.266,34.494) 14.299,34.757 ; 13.266,35.56 cw(c13.266,34.494) 14.299,34.757 ; 13.266,35.56 cw(c13.266,34.494) 14.299,34.757 ; 13.266,35.56 cw(c13.266,34.494) 14.299,34.757 ; 13.266,35.56 cw(c13.266,34.494) 14.299,34.757 ; 13.266,35.56 cw(c13.266,34.494) 14.299,34.757 ; 13.266,35.56 cw(c13.266,34.494) 14.299,34.757 ; 13.266,35.56 cw(c13.266,34.494) 14.299,34.757 ; 13.266,35.56 cw(c13.266,34.494) 14.299,34.757 ; 13.266,35.56 cw(c13.266,34.494) 14.299,34.757 ; 13.266,35.56 cw(c13.266,34.494) 14.299,34.757 ; 13.266,35.56 cw(c13.266,34.494) 14.299,34.757 ; 13.266,35.56 cw(c13.266,34.494) 14.299,34.757 ; 13.266,35.56 cw(c13.266,34.494) 14.299,34.757 ; 13.266,35.56 cw(c13.266,34.494) 14.299,34.757 ; 13.266,35.56 cw(c13.266,34.494) 14.299,34.757 ; 13.266,35.56 cw(c13.266,34.494) 14.299,34.757 ; 13.266,35.56 cw(c13.266,34.494) 14.299,34.757 ; 13.266,35.56 cw(c13.266,34.494) 14.299,34.757 ; 13.266,35.56 cw(c13.266,34.494) 14.299,34.757 ; 13.266,35.56 cw(c13.266,34.494) 14.299,34.757 ; 13.266,35.56 cw(c13.266,34.494) 14.299,34.757 ; 13.266,35.56 cw(c13.266,34.494) 14.299,34.757 ; 13.266,35.56 cw(c13.266,34.494) 14.299,34.757 ; 13.266,35.56 cw(c13.266,34.494) 14.299,34.757 ; 13.266,35.56 cw(c13.266,34.494) 14.299,34.757 ; 13.266,35.56 cw(c13.266,34.494) 14.299,34.757 ; 13.266,35.56 cw(c13.266,34.494) 14.299,34.757 ; 13.266,35.56 cw(c13.266,34.494) 14.299,34.757 ; 13.266,35.56 cw(c13.266,34.494) 14.299,34.757 ; 13.266,35.56 cw(c13.266,34.494) 14.299,34.757 ; 13.266,35.56 cw(c13.266,34.494) 14.299,34.757 ; 13.266,35.56 cw(c13.266,34.494) 14.299,34.757 ; 13.266,35.56 cw(c13.266,34.494) 14.299,34.757 ; 13.266,35.56 cw(c13.266,34.494) 14.299,34.757 ; 13.266,35.56 cw(c13.266,34.494) 14.299,34.757 ; 13.266,35.56 cw(c13.266,34.494) 14.299,34.757 ; 13.266,35.56 cw(c13.266,34.494) 14.299,34.757 ; 13.266,35.56 cw(c13.266,34.494) 14.299,34.757 ; 13.266,35.56 cw(c13.266,34.494) 14.299,34.757 ; 13.266,35.56 cw(c13.266,34.494) 14.299,34.757 ; 13.266,35.56 cw(c13.266,34.494) 14.299,34.757 ; 13.266,35.56 cw(c13.266,34.494) 14.299,34.757 ; 13.266,35.56 cw(c13.266,34.494) 14.299,34.757 ; 13.266,35.56 cw(c13.266,34.494) 14.299,34.757 ; 13.266,35.56 cw(c13.266,34.494) 14.299,34.757 ; 13.266,35.56 cw(c13.266,34.494) 14.299,34.757 ; 13.266,35.56 cw(c13.266,34.494) 14.299,34.757 ; 13.266,35.56 cw(c13.266,34.494) 14.299,34.757 ; 13.266,35.56 cw(c13.266,34.494) 14.299,34.757 ; 13.266,35.56 cw(c13.266,34.494) 14.299,34.757 ; 13.266,35.56 cw(c13.266,34.494) 14.299,34.757 ; 13.266,35.56 cw(c13.266,34.494) 14.299,34.757 ; 13.266,35.56 cw(c13.266,34.494) 14.299,34.757 ; 13.266,35.56 cw(c13.266,34.494) 14.299,34.757 ; 13.266,35.56 cw(c13.266,34.494) 14.299,34.757 ; 13.266,35.56 cw(c13.266,34.494) 14.299,34.757 ; 13.266,35.56 cw(c13.266,34.494) 14.299,34.757 ; 13.266,35.56 cw(c13.266,34.494) 14.299,34.757 ; 13.266,35.56 cw(c13.266,34.494) 14.299,34.757 ; 13.266,35.56 cw(c13.266,34.494) 14.299,34.757 ; 13.266,35.56 cw(c13.266,34.494) 14.299,34.757 ; 13.266,35.56 cw(c13.266,34.494) 14.299,34.757 ; 13.266,35.56 cw(c13.266,34.494) 14.299,34.757 ; 13.266,35.56 cw(c13.266,34.494) 14.299,34.757 ; 13.266,35.56 cw(c13.266,34.494) 14.299,34.757 ; 13.266,35.56 cw(c13.266,34.494) 14.299,34.757 ; 13.266,35.56 cw(c13.266,34.494) 14.299,34.757 ; 13.266,35.56 cw(c13.266,34.494) 14.299,34.757 ; 13.266,35.56 cw(c13.266,34.494) 14.299,34.757 ; 13.266,35.56 cw(c13.266,34.494) 14.299,34.757 ; 13.266,35.56 cw(c13.266,34.494) 14.299,34.757 ; 13.266,35.56 cw(c13.266,34.494) 14.299,34.757 ; 13.266,35.56 cw(c13.266,34.494) 14.299,34.757 ; 13.266,35.56 cw(c13.266,34.494) 14.299,34.757 ; 13.266,35.56 cw(c13.266,34.494) 14.299,34.757 ; 13.266,35.56 cw(c13.266,34.494) 14.299,34.757 ; 13.266,35.56 cw(c13.266,34.494) 14.299,34.757 ; 13.266,35.56 cw(c13.266,34.494) 14.299,34.757 ; 13.266,35.56 cw(c13.266,34.494) 14.299,34.757 ; 13.266,35.56 cw(c13.266,34.494) 14.299,34.757 ; 13.266,35.56 cw(c13.266,34.494) 14.299,34.757 ; 13.266,35.56 cw(c13.266,34.494) 14.299,34.757 ; 13.266,35.56 cw(c13.266,34.494) 14.299,34.757 ; 13.266,35.56 cw(c13.266,34.494) 14.299,34.757 ; 13.266,35.56 cw(c13.266,34.494) 14.299,34.757 ; 13.266,35.56 cw(c13.266,34.494) 14.299,34.757 ; 13.266,35.56 cw(c13.266,34.494) 14.299,34.757 ; 13.266,35.56 cw(c13.266,34.494) 14.299,34.757 ; 13.266,35.56 cw(c13.266,34.494) 14.299,34.757 ; 13.266,35.56 cw(c13.266,34.494) 14.299,34.757 ; 13.266,35.56 cw(c13.266,34.494) 14.299,34.757 ; 13.266,35.56 cw(c13.266,34.494) 14.299,34.757 ; 13.266,35.56 cw(c13.266,34.494) 14.299,34.757 ; 13.266,35.56 cw(c13.266,34.494) 14.299,34.757 ; 13.266,35.56 cw(c13.266,34.494) 14.299,34.757 ; 13.266,35.56 cw(c13.266,34.494) 14.299,34.757 ; 13.266,35.56 cw(c13.266,34.494) 14.299,34.757 ; 13.266,35.56 cw(c13.266,34.494) 14.299,34.757 ; 13.266,35.56 cw(c13.266,34.494) 14.299,34.757 ; 13.266,35.56 cw(c13.266,34.494) 14.299,34.757 ; 13.266,35.56 cw(c13.266,34.494) 14.299,34.757 ; 13.266,35.56 cw(c13.266,34.494) 14.299,34.757 ; 13.266,35.56 cw(c13.266,34.494) 14.299,34.757 ; 13.266,35.56 cw(c13.266,34.494) 14.299,34.757 ; 13.266,35.56 cw(c13.266,34.494) 14.299,34.757 ; 13.266,35.56 cw(c13.266,34.494) 14.299,34.757 ; 13.266,35.56 cw(c13.266,34.494) 14.299,34.757 ; 13.266,35.56 cw(c13.266,34.494) 14.299,34.757 ; 13.266,35.56 cw(c13.266,34.494) 14.299,34.757 ; 13.266,35.56 cw(c13.266,34.494) 14.299,34.757 ; 13.266,35.56 cw(c13.266,34.494) 14.299,34.757 ; 13.266,35.56 cw(c13.266,34.494) 14.299,34.757 ; 13.266,35.56 cw(c13.266,34.494) 14.299,34.757 ; 13.266,35.56 cw(c13.266,34.494) 14.299,34.757 ; 13.266,35.56 cw(c13.266,34.494) 14.299,34.757 ; 13.266,35.56 cw(c13.266,34.494) 14.299,34.757 ; 13.266,35.56 cw(c13.266,34.494) 14.299,34.757 ; 13.266,35.56 cw(c13.266,34.494) 14.299,34.757 ; 13.266,35.56 cw(c13.266,34.494) 14.299,34.757 ; 13.266,35.56 cw(c13.266,34.494) 14.299,34.757 ; 13.266,35.56 cw(c13.266,34.494) 14.299,34.757 ; 13.266,35.56 cw(c13.266,34.494) 14.299,34.757 ; 13.266,35.56 cw(c13.266,34.494) 14.299,34.757 ; 13.266,35.56 cw(c13.266,34.494) 14.299,34.757 ; 13.266,35.56 cw(c13.266,34.494) 14.299,34.757 ; 13.266,35.56 cw(c13.266,34.494) 14.299,34.757 ; 13.266,35.56 cw(c13.266,34.494) 14.299,34.757 ; 13.266,35.56 cw(c13.266,34.494) 14.299,34.757 ; 13.266,35.56 cw(c13.266,34.494) 14.299,34.757 ; 13.266,35.56 cw(c13.266,34.494) 14.299,34.757 ; 13.266,35.56 cw(c13.266,34.494) 14.299,34.757 ; 13.266,35.56 cw(c13.266,34.494) 14.299,34.757 ; 13.266,35.56 cw(c13.266,34.494) 14.299,34.757 ; 13.266,35.56 cw(c13.266,34.494) 14.299,34.757 ; 13.266,35.56 cw(c13.266,34.494) 14.299,34.757 ; 13.266,35.56 cw(c13.266,34.494) 14.299,34.757 ; 13.266,35.56 cw(c13.266,34.494) 14.299,34.757 ; 13.266,35.56 cw(c13.266,34.494) 14.299,34.757 ; 13.266,35.56 cw(c13.266,34.494) 14.299,34.757 ; 13.266,35.56 cw(c13.266,34.494) 14.299,34.757 ; 13.266,35.56 cw(c13.266,34.494) 14.299,34.757 ; 13.266,35.56 cw(c13.266,34.494) 14.299,34.757 ; 13.266,35.56 cw(c13.266,34.494) 14.299,34.757 ; 13.266,35.56 cw(c13.266,34.494) 14.299,34.757 ; 13.266,35.56 cw(c13.266,34.494) 14.299,34.757 ; 13.266,35.56 cw(c13.266,34.494) 14.299,34.757 ; 13.266,35.56 cw(c13.266,34.494) 14.299,34.757 ; 13.266,35.56 cw(c13.266,34.494) 14.299,34.757 ; 13.266,35.56 cw(c13.266,34.494) 14.299,34.757 ; 13.266,35.56 cw(c13.266,34.494) 14.299,34.757 ; 13.266,35.56 cw(c13.266,34.494) 14.299,34.757 ; 13.266,35.56 cw(c13.266,34.494) 14.299,34.757 ; 13.266,35.56 cw(c13.266,34.494) 14.299,34.757 ; 13.266,35.56 cw(c13.266,34.494) 14.299,34.757 ; 13.266,35.56 cw(c13.266,34.494) 14.299,34.757 ; 13.266,35.56 cw(c13.266,34.494) 14.299,34.757 ; 13.266,35.56 cw(c13.266,34.494) 14.299,34.757 ; 13.266,35.56 cw(c13.266,34.494) 14.299,34.757 ; 13.266,35.56 cw(c13.266,34.494) 14.299,34.757 ; 13.266,35.56 cw(c13.266,34.494) 14.299,34.757 ; 13.266,35.56 cw(c13.266,34.494) 14.299,34.757 ; 13.266,35.56 cw(c13.266,34.494) 14.299,34.757 ; 13.266,35.56 cw(c13.266,34.494) 14.299,34.757 ; 13.266,35.56 cw(c13.266,34.494) 14.299,34.757 ; 13.266,35.56 cw(c13.266,34.494) 14.299,34.757 ; 13.266,35.56 cw(c13.266,34.494) 14.299,34.757 ; 13.266,35.56 cw(c13.266,34.494) 14.299,34.757 ; 13.266,35.56 cw(c13.266,34.494) 14.299,34.757 ; 13.266,35.56 cw(c13.266,34.494) 14.299,34.757 ; 13.266,35.56 cw(c13.266,34.494) 14.299,34.757 ; 13.266,35.56 cw(c13.266,34.494) 14.299,34.757 ; 13.266,35.56 cw(c13.266,34.494) 14.299,34.757 ; 13.266,35.56 cw(c13.266,34.494) 14.299,34.757 ; 13.266,35.56 cw(c13.266,34.494) 14.299,34.757 ; 13.266,35.56 cw(c13.266,34.494) 14.299,34.757 ; 13.266,35.56 cw(c13.266,34.494) 14.299,34.757 ; 13.266,35.56 cw(c13.266,34.494) 14.299,34.757 ; 13.266,35.56 cw(c13.266,34.494) 14.299,34.757 ; 13.266,35.56 cw(c13.266,34.494) 14.299,34.757 ; 13.266,35.56 cw(c13.266,34.494) 14.299,34.757 ; 13.266,35.56 cw(c13.266,34.494) 14.299,34.757 ; 13.266,35.56 cw(c13.266,34.494) 14.299,34.757 ; 13.266,35.56 cw(c13.266,34.494) 14.299,34.757 ; 13.266,35.56 cw(c13.266,34.494) 14.299,34.757 ; 13.266,35.56 cw(c13.266,34.494) 14.299,34.757 ; 13.266,35.56 cw(c13.266,34.494) 14.299,34.757 ; 13.266,35.56 cw(c13.266,34.494) 14.299,34.757 ; 13.266,35.56 cw(c13.266,34.494) 14.299,34.757 ; 13.266,35.56 cw(c13.266,34.494) 14.299,34.757 ; 13.266,35.56 cw(c13.266,34.494) 14.299,34.757 ; 13.266,35.56 cw(c13.266,34.494) 14.299,34.757 ; 13.266,35.56 cw(c13.266,34.494) 14.299,34.757 ; 13.266,35.56 cw(c13.266,34.494) 14.299,34.757 ; 13.266,35.56 cw(c13.266,34.494) 14.299,34.757 ; 13.266,35.56 cw(c13.266,34.494) 14.299,34.757 ; 13.266,35.56 cw(c13.266,34.494) 14.299,34.757 ; 13.266,35.56 cw(c13.266,34.494) 14.299,34.757 ; 13.266,35.56 cw(c13.266,34.494) 14.299,34.757 ; 13.266,35.56 cw(c13.266,34.494) 14.299,34.757 ; 13.266,35.56 cw(c13.266,34.494) 14.299,34.757 ; 13.266,35.56 cw(c13.266,34.494) 14.299,34.757 ; 13.266,35.56 cw(c13.266,34.494) 14.299,34.757 ; 13.266,35.56 cw(c13.266,34.494) 14.299,34.757 ; 13.266,35.56 cw(c13.266,34.494) 14.299,34.757 ; 13.266,35.56 cw(c13.266,34.494) 14.299,34.757 ; 13.266,35.56 cw(c13.266,34.494) 14.299,34.757 ; 13.266,35.56 cw(c13.266,34.494) 14.299,34.757 ; 13.266,35.56 cw(c13.266,34.494) 14.299,34.757 ; 13.266,35.56 cw(c13.266,34.494) 14.299,34.757 ; 13.266,35.56 cw(c13.266,34.494) 14.299,34.757 ; 13.266,35.56 cw(c13.266,34.494) 14.299,34.757 ; 13.266,35.56 cw(c13.266,34.494) 14.299,34.757 ; 13.266,35.56 cw(c13.266,34.494) 14.299,34.757 ; 13.266,35.56 cw(c13.266,34.494) 14.299,34.757 ; 13.266,35.56 cw(c13.266,34.494) 14.299,34.757 ; 13.266,35.56 cw(c13.266,34.494) 14.299,34.757 ; 13.266,35.56 cw(c13.266,34.494) 14.299,34.757 ; 13.266,35.56 cw(c13.266,34.494) 14.299,34.757 ; 13.266,35.56 cw(c13.266,34.494) 14.299,34.757 ; 13.266,35.56 cw(c13.266,34.494) 14.299,34.757 ; 13.266,35.56 cw(c13.266,34.494) 14.299,34.757 ; 13.266,35.56 cw(c13.266,34.494) 14.299,34.757 ; 13.266,35.56 cw(c13.266,34.494) 14.299,34.757 ; 13.266,35.56 cw(c13.266,34.494) 14.299,34.757 ; 13.266,35.56 cw(c13.266,34.494) 14.299,34.757 ; 13.266,35.56 cw(c13.266,34.494) 14.299,34.757 ; 13.266,35.56 cw(c13.266,34.494) 14.299,34.757 ; 13.266,35.56 cw(c13.266,34.494) 14.299,34.757 ; 13.266,35.56 cw(c13.266,34.494) 14.299,34.757 ; 13.266,35.56 cw(c13.266,34.494) 14.299,34.757 ; 13.266,35.56 cw(c13.266,34.494) 14.299,34.757 ; 13.266,35.56 cw(c13.266,34.494) 14.299,34.757 ; 13.266,35.56 cw(c13.266,34.494) 14.299,34.757 ; 13.266,35.56 cw(c13.266,34.494) 14.299,34.757 ; 13.266,35.56 cw(c13.266,34.494) 14.299,34.757 ; 13.266,35.56 cw(c13.266,34.494) 14.299,34.757 ; 13.266,35.56 cw(c13.266,34.494) 14.299,34.757 ; 13.266,35.56 cw(c13.266,34.494) 14.299,34.757 ; 13.266,35.56 cw(c13.266,34.494) 14.299,34.757 ; 13.266,35.56 cw(c13.266,34.494) 14.299,34.757 ; 13.266,35.56 cw(c13.266,34.494) 14.299,34.757 ; 13.266,35.56 cw(c13.266,34.494) 14.299,34.757 ; 13.266,35.56 cw(c13.266,34.494) 14.299,34.757 ; 13.266,35.56 cw(c13.266,34.494) 14.299,34.757 ; 13.266,35.56 cw(c13.266,34.494) 14.299,34.757 ; 13.266,35.56 cw(c13.266,34.494) 14.299,34.757 ; 13.266,35.56 cw(c13.266,34.494) 14.299,34.757 ; 13.266,35.56 cw(c13.266,34.494) 14.299,34.757 ; 13.266,35.56 cw(c13.266,34.494) 14.299,34.757 ; 13.266,35.56 cw(c13.266,34.494) 14.299,34.757 ; 13.266,35.56 cw(c13.266,34.494) 14.299,34.757 ; 13.266,35.56 cw(c13.266,34.494) 14.299,34.757 ; 13.266,35.56 cw(c13.266,34.494) 14.299,34.757 ; 13.266,35.56 cw(c13.266,34.494) 14.299,34.757 ; 13.266,35.56 cw(c13.266,34.494) 14.299,34.757 ; 13.266,35.56 cw(c13.266,34.494) 14.299,34.757 ; 13.266,35.56 cw(c13.266,34.494) 14.299,34.757 ; 13.266,35.56 cw(c13.266,34.494) 14.299,34.757 ; 13.266,35.56 cw(c13.266,34.494) 14.299,34.757 ; 13.266,35.56 cw(c13.266,34.494) 14.299,34.757 ; 13.266,35.56 cw(c13.266,34.494) 14.299,34.757 ; 13.266,35.56 cw(c13.266,34.494) 14.299,34.757 ; 13.266,35.56 cw(c13.266,34.494) 14.299,34.757 ; 13.266,35.56 cw(c13.266,34.494) 14.299,34.757 ; 13.266,35.56 cw(c13.266,34.494) 14.299,34.757 ; 13.266,35.56 cw(c13.266,34.494) 14.299,34.757 ; 13.266,35.56 cw(c13.266,34.494) 14.299,34.757
GSM_WAKE#: U1.30 U2.1 | length 21
  Top Layer w0.203: U1.30 13.997,32.777 15.367,34.147 v1(15.367,34.417) ; v1(29.337,32.258) 29.485,32.258 30.851,30.892 U2.1
  Bottom Layer w0.203: v1(15.367,34.417) 15.367,33.02 16.129,32.258 v1(29.337,32.258)
MCU_CTS: U1.18 U2.25 | length 21.7
  Top Layer w0.203: U1.18 U1.18@19.355,20.547 ; U2.25 31.749,18.29 32.573,18.29 33.11,18.828 33.11,21.823 32.782,22.151 22.659,22.151 21.082,20.574 19.612,20.574 19.482,20.704 19.482,21.082 19.355,21.082 ; U1.18@19.355,20.547 19.355,21.082 ; U1.18@19.355,20.547 19.355,21.082 ; U1.18@19.355,20.547 19.355,21.082
MCU_RTS: U1.17 U2.23 | length 18.6
  Top Layer w0.203: U1.17 19.585,19.277 19.839,19.531 20.547,19.531 22.837,21.821 32.646,21.821 32.78,21.687 32.78,19.297 32.573,19.09 31.749,19.09 U2.23
MCU_RXD: U1.11 U2.13 | length 79.1
  Top Layer w0.203: U1.11 14.34,14.324 14.728,13.994 15.851,13.994 15.91,13.935 27.796,2.049 27.856,1.989 27.943,1.989 29.419,2.007 41.919,2.163 42.05,2.165 42.303,2.174 42.321,2.193 48.04,2.193 49.149,3.302 49.149,21.971 48.641,22.479 36.449,22.479 32.864,26.064 31.579,26.064 U2.13
MCU_TXD: U1.10 U2.11 | length 82.7
  Top Layer w0.203: U1.10 12.7,14.945 12.7,13.708 12.819,13.589 15.476,13.589 15.537,13.529 27.258,1.634 27.318,1.575 29.671,1.575 45.983,1.863 48.218,1.863 49.53,3.175 49.53,22.225 48.895,22.86 36.703,22.86 32.737,26.826 31.617,26.826 U2.11
NetC2_1: C2.1 R1.2 SW1.2 U1.3 | length 44.6
  Top Layer w0.203: v1(3.175,39.116) 3.379,39.32 3.699,39.32 6.568,42.189 SW1.2@6.568,42.761 ; U1.3 3.837,14.667 6.477,12.027 v1(6.477,11.938) 7.205,11.21 8.109,10.306 R1.2 C2.1
  Bottom Layer w0.203: v1(3.175,39.116) 3.175,15.275 6.477,11.973 v1(6.477,11.938)
NetC4_1: C4.1 R9.2 TVS1.6 U2.10 USIM1.C7 | length 71.2
  Top Layer w0.203: v1(29.591,47.879) 31.72,47.879 C4.1 31.878,48.037 31.878,48.642 34.417,51.181 34.417,55.634 35.171,56.388 36.726,56.388 37.103,56.011 R9.2 ; U2.10@39.758,27.298 U2.10 41.499,27.292 41.893,27.686 v1(43.434,27.686) ; TVS1.6 41.336,45.908 v1(42.418,46.99) 55.633,46.99 56.409,47.766 56.509,47.766 USIM1.C7@56.707,47.964 ; USIM1.C7@56.707,47.964 USIM1.C7 USIM1.C7@56.707,47.964
  Bottom Layer w0.203: v1(29.591,47.879) 30.48,46.99 v1(42.418,46.99) 43.053,46.355 44.704,46.355 45.847,45.212 45.847,30.099 v1(43.434,27.686)
NetC5_1: C5.1 TVS1.5 U2.12 USIM1.C3 | length 66.7
  Top Layer w0.203: v1(29.845,45.339) 29.936,45.339 30.555,44.72 C5.1 ; U2.12 39.949,26.69 43.962,26.69 45.339,28.067 45.339,43.78 44.45,44.669 v1(44.45,44.958) ; TVS1.5 41.529,44.958 v1(44.45,44.958) ; USIM1.C3 56.707,51.742 57.236,51.213 57.236,47.569 54.624,44.958 v1(44.45,44.958)
  Bottom Layer w0.203: v1(29.845,45.339) 43.798,45.339 44.179,44.958 v1(44.45,44.958)
NetC6_1: C6.1 TVS1.4 U2.14 USIM1.C2 | length 64.5
  Top Layer w0.203: C6.1 31.72,41.783 v1(29.718,41.783) 29.718,40.513 37.338,32.893 37.338,27.282 38.729,25.89 39.553,25.89 U2.14 U2.14@39.796,25.736 ; TVS1.4@40.439,44.096 40.297,44.192 TVS1.4@40.42,44.069 ; v1(42.672,43.815) 40.674,43.815 TVS1.4 TVS1.4@40.42,44.069 ; USIM1.C2 52.65,55.684 47.962,50.996 40.836,50.996 39.243,49.403 39.243,44.196 39.37,44.069 TVS1.4@40.42,44.069
  Bottom Layer w0.203: v1(29.718,41.783) 29.71,41.775 29.71,41.021 39.878,41.021 v1(42.672,43.815)
NetC7_1: C7.1 R9.1 TVS1.3 U2.8 USIM1.C1 | length 44.4
  Top Layer w0.203: C7.1 C7.1@36.651,52.543 ; TVS1.3 TVS1.3@37.935,44.008 ; U2.8 39.553,28.29 38.729,28.29 38.138,28.882 38.138,43.805 TVS1.3@37.935,44.008 ; USIM1.C1 51.627,55.784 51.429,55.982 50.128,55.982 49.828,56.283 46.694,56.283 46.418,56.007 R9.1 42.907,54.833 40.617,52.543 C7.1@36.651,52.543 ; C7.1@36.651,52.543 38.468,50.726 38.468,44.541 TVS1.3@37.935,44.008
NetC10_1: C10.1 R10.1 U3.6 | length 31.5
  Top Layer w0.203: R10.1 R10.1@96.374,56.165
  Top Layer w0.406: C10.1 75.369,55.372 ; U3.6 76.639,54.102 75.369,55.372 ; R10.1@96.374,56.165 95.389,57.15 77.147,57.15 75.369,55.372
NetC11_1: C11.1 U3.7 | length 33
  Top Layer w0.406: C11.1@72.009,52.832 U3.7 ; C11.1@71.939,52.832 U3.7 ; C11.1@71.939,52.832 U3.7 ; C11.1@71.939,52.832 U3.7
NetC11_2: C11.2 L1.1 U3.8 | length 16.2
  Top Layer w0.406: L1.1 72.009,45.751 C11.2@72.009,51.324 ; U3.8 C11.2@72.247,51.562 ; C11.2@72.009,51.324 C11.2@72.247,51.562 ; C11.2@72.009,51.324 C11.2@72.247,51.562 ; C11.2@72.009,51.324 C11.2@72.247,51.562
NetJ1_1: J1.1 U1.25 | length 30.4
  Top Layer w0.203: J1.1 18.009,52.095 18.009,46.126 21.109,43.026 21.109,30.427 20.118,29.437 U1.25
NetJ1_2: J1.2 U1.19 | length 44.5
  Top Layer w0.203: J1.2 18.161,56.769 22.352,56.769 23.241,55.88 23.241,23.216 21.842,21.817 U1.19
NetJ1_3: J1.3 U1.21 | length 34.6
  Top Layer w0.203: U1.21 20.903,24.357 21.971,25.425 21.971,53.213 J1.3
NetJ1_4: J1.4 U1.20 | length 35.4
  Top Layer w0.203: U1.20 21.336,23.087 22.479,24.23 22.479,54.974 22.098,55.355 J1.4
NetJ1_7: J1.7 U1.23 | length 34.7
  Top Layer w0.203: U1.23 20.415,26.897 21.082,27.564 v1(21.082,27.813) ; v1(24.511,30.48) 24.511,40.213 24.13,40.594 24.13,50.038 J1.7
  Bottom Layer w0.203: v1(21.082,27.813) 21.371,27.813 21.853,28.295 22.072,28.295 24.257,30.48 v1(24.511,30.48)
NetJ1_8: J1.8 U1.22 | length 40.3
  Top Layer w0.203: U1.22 19.338,25.908 v1(21.082,25.908) ; v1(25.4,25.527) 25.4,37.176 24.994,37.582 24.994,49.074 31.546,55.626 J1.8
  Bottom Layer w0.203: v1(21.082,25.908) 21.273,25.717 25.209,25.717 v1(25.4,25.527)
NetJ2_2: J2.2 U1.37 | length 25.1
  Top Layer w0.203: U1.37 5.107,34.368 7.798,37.059 7.798,53.289 J2.2
NetJ2_3: J2.3 U1.36 | length 23.8
  Top Layer w0.203: U1.36 6.377,34.925 8.128,36.676 J2.3
NetLS1_1: LS1.1 R13.1 U1.15 | length 99.6
  Top Layer w0.203: U1.15 19.157,16.637 v1(21.209,16.637) ; R13.1 19.539,3.403 19.916,3.78 20.671,3.78 v1(21.336,4.445)
  Bottom Layer w0.203: v1(21.209,16.637) v1@21.209,16.432 ; v1(21.336,4.445) 21.273,4.508 21.273,16.369 v1@21.209,16.432 ; LS1.1 61.798,9.652 61.239,9.093 28.548,9.093 v1@21.209,16.432
NetR2_2: R2.2 U1.8 | length 20.7
  Top Layer w0.203: v1(1.905,3.937) 3.071,3.937 3.448,3.56 R2.2 ; v1(9.525,12.319) 9.525,12.324 10.187,12.986 U1.8
  Bottom Layer w0.203: v1(1.905,3.937) 1.905,3.996 1.27,4.631 1.27,10.041 1.643,10.414 7.62,10.414 v1(9.525,12.319)
NetR3_1: R3.1 U1.38 | length 13.3
  Top Layer w0.203: U1.38 3.837,36.617 4.445,37.225 v1(4.445,37.338) ; v1(10.795,37.465) R3.1
  Bottom Layer w0.203: v1(4.445,37.338) 4.508,37.401 10.731,37.401 v1(10.795,37.465)
NetR4_1: R4.1 SW2.1 U1.27 | length 19
  Top Layer w0.203: R4.1 12.681,47.136 14.565,45.252 14.565,42.202 15.002,41.764 15.513,41.764 17.807,39.47 U1.27
NetR10_2: R10.2 U3.4 | length 5.6
  Top Layer w0.203: R10.2@90.193,55.372 90.57,54.995 R10.2
  Top Layer w0.406: U3.4 R10.2@90.193,55.372
NetR11_2: R11.2 R12.1 U3.5 | length 52.3
  Top Layer w0.406: v1(77.343,55.372) U3.5 ; R11.2 100.584,45.6 100.831,45.847 v1(102.108,45.847) 102.108,47.152 102.454,47.498 113.538,47.498 113.9,47.136 R12.1
  Bottom Layer w0.406: v1(77.343,55.372) 92.583,55.372 v1(102.108,45.847)
USB_DM: U1.13 U2.36 | length 56.5
  Top Layer w0.203: U1.13 16.88,14.324 17.477,13.7 28.84,2.337 29.282,2.337 41.912,2.493 42.166,2.505 42.184,2.523 47.481,2.523 48.768,3.81 48.768,12.827 48.006,13.589 42.224,13.589 42.172,13.641 39.802,13.641 U2.36
USB_DP: U1.14 U2.38 | length 53.6